# Altium PCB CARD-PIN.PCBDOC (part 2 of 2)
Units mil, origin at the board's own origin, x right, y up, seen from the top; angles counter-clockwise.
Board outline 5110 x 4320 mil, 2 copper layers (Top Layer, Bottom Layer); 210 components, 32 nets, 825 pads, 362 vias.
Unrouted connection lines stored in the file: 455.
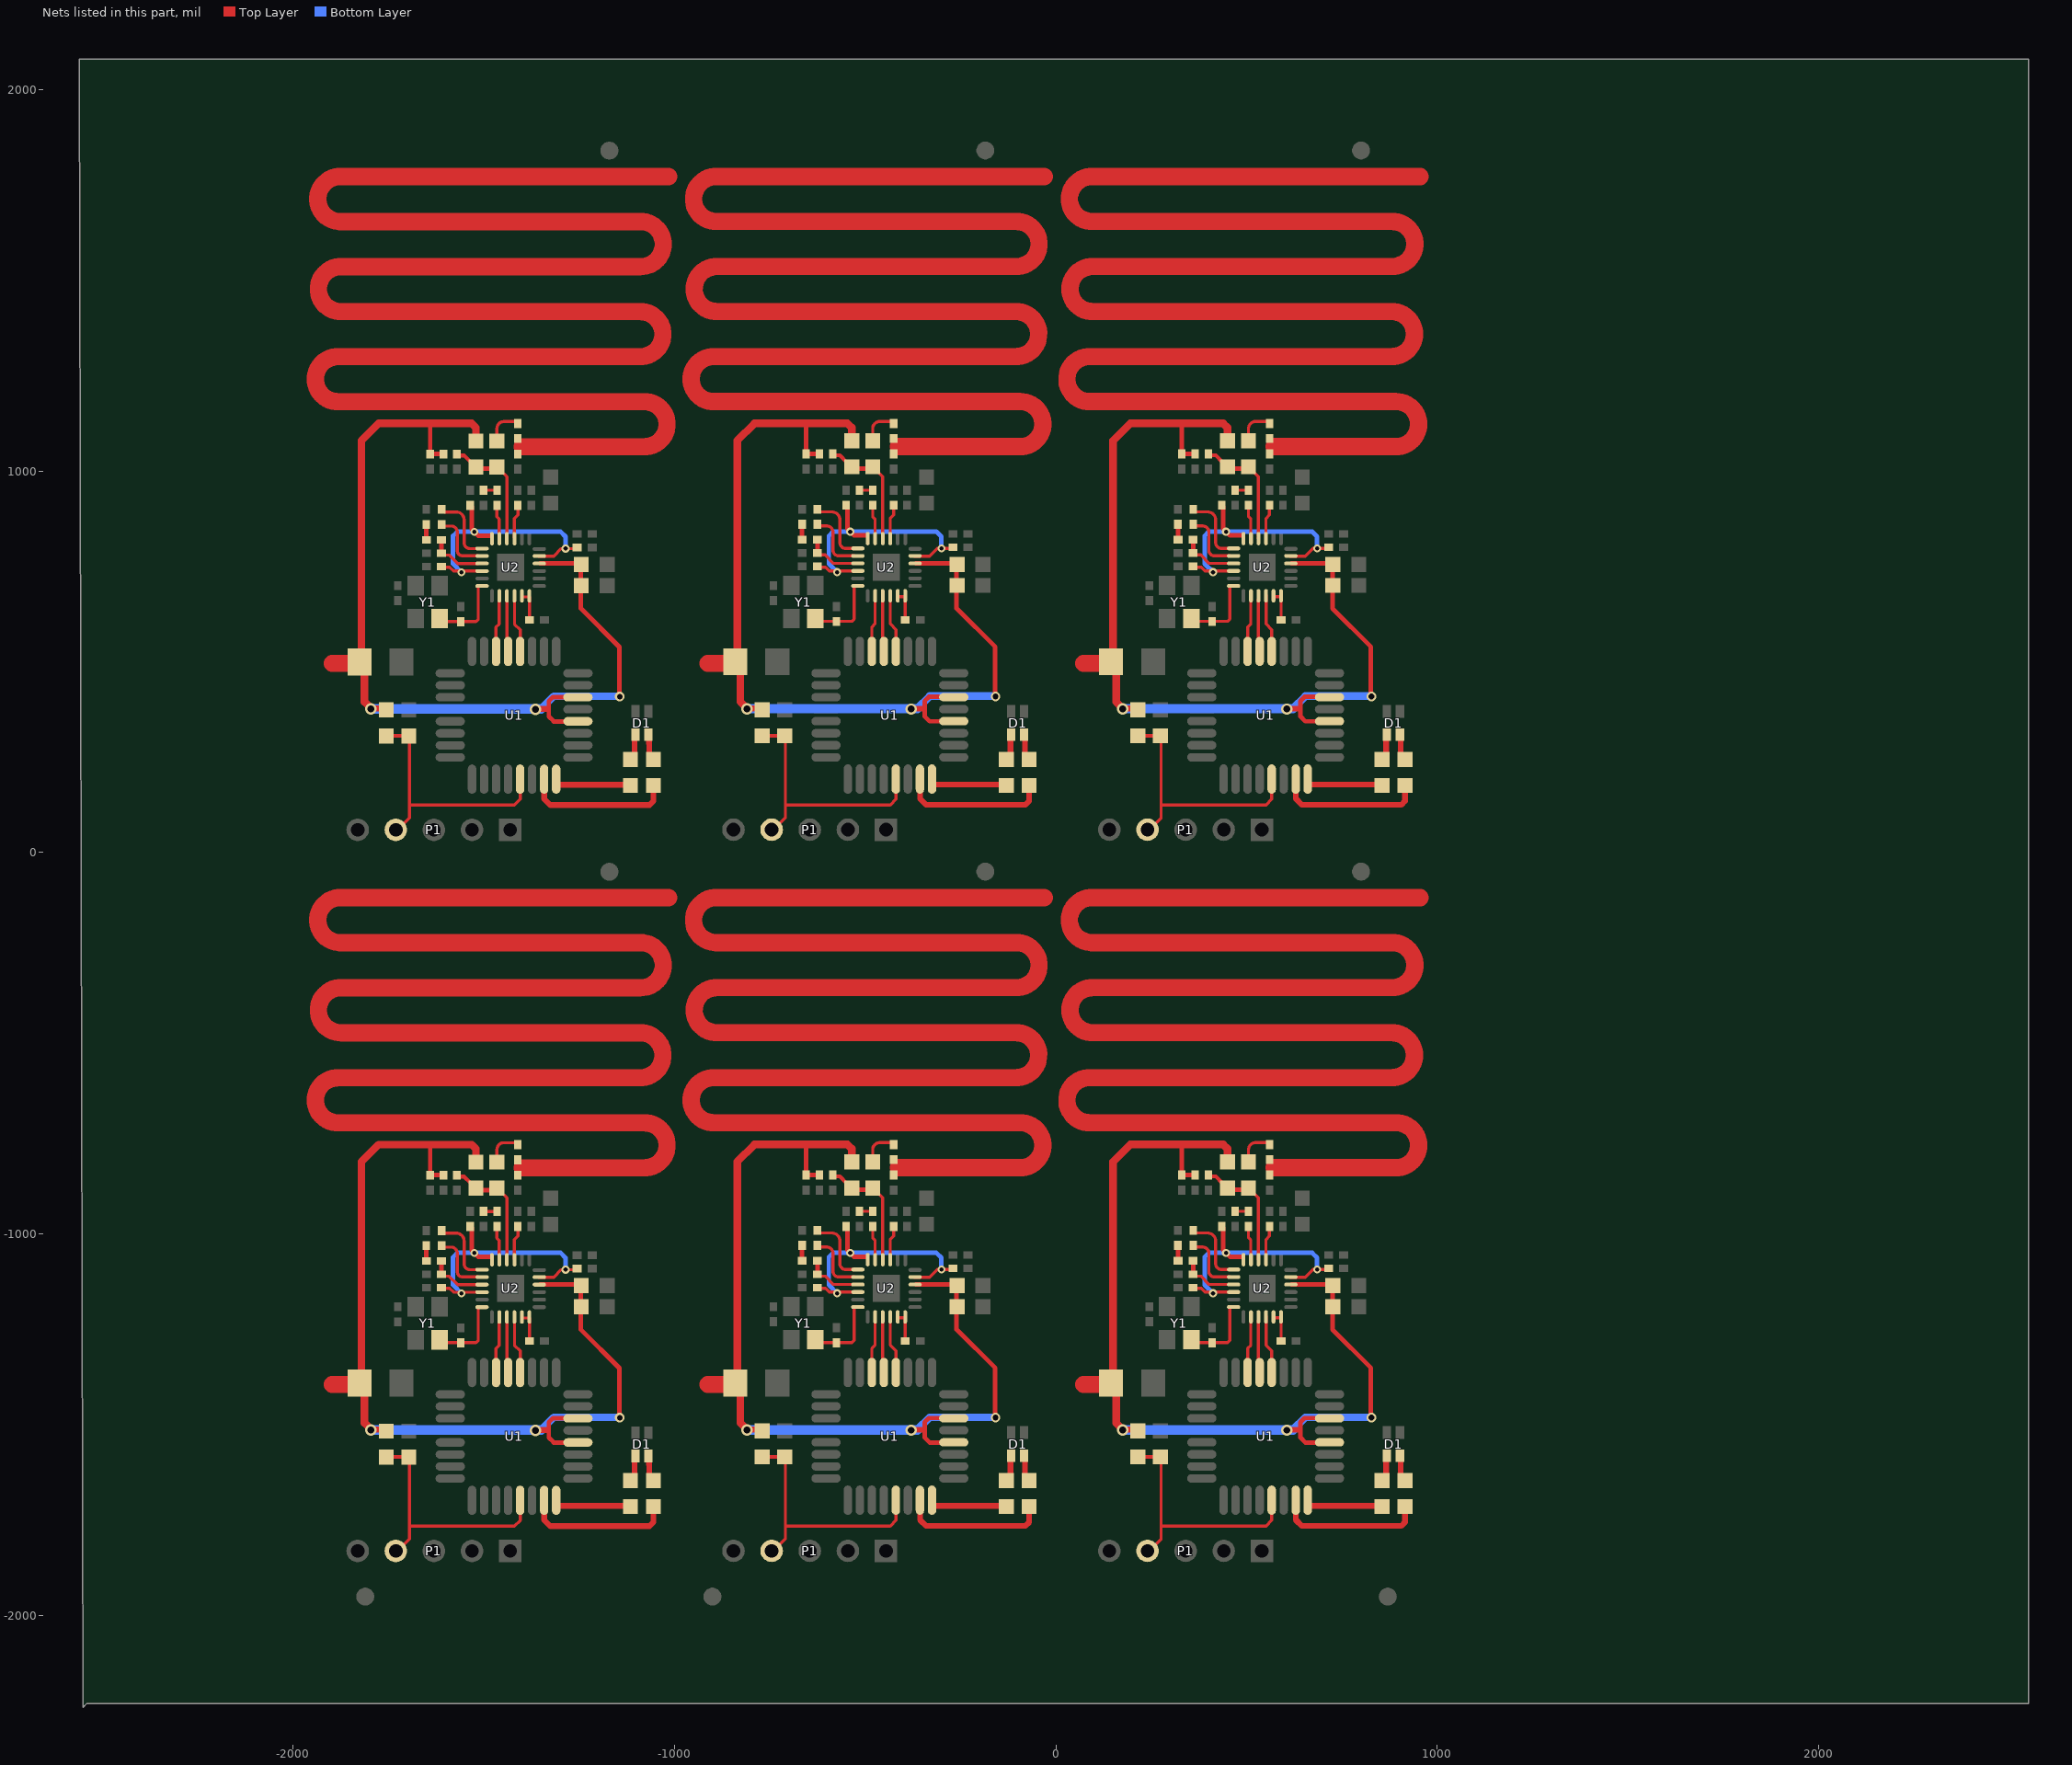
[diagram p2: the nets of this part, all layers, seen from the top]

## Via types
v1: diameter 28, hole 15, Top Layer to Bottom Layer, 240 vias
v2: diameter 20, hole 12, Top Layer to Bottom Layer, 36 vias
v3: diameter 20, hole 10, Top Layer to Bottom Layer, tented top, 30 vias
v4: diameter 21, hole 11, Top Layer to Bottom Layer, 18 vias
v5: diameter 22, hole 13, Top Layer to Bottom Layer, 18 vias
v6: diameter 30, hole 18, Top Layer to Bottom Layer, 12 vias
v7: diameter 25, hole 15, Top Layer to Bottom Layer, 6 vias
v8: diameter 24, hole 15, Top Layer to Bottom Layer, 2 vias

## Nets (pads, with @x,y where several pads share a name; then routed paths per layer and width w, separated by ;. In a path a pad name is that pad's centre, name@x,y a point inside that pad or via, vN(x,y) a via of type N, cw(c..) or ccw(c..) an arc to the next point about the centre after c; other vN are vias at no path point) (continued)
NetC9_2: C9.2 C12.2 | length 37793.3
  Top Layer w8: C12.2@-1411,-808.24 -1410,-808.03 C12.2@-1409.38,-807.9 ; C12.2@-1411,1081.76 -1410,1081.97 C12.2@-1409.38,1082.1 ; C12.2@-426,-808 -425,-807.79 C12.2@-424.38,-807.66 ; C12.2@-426,1082 -425,1082.21 C12.2@-424.38,1082.34 ; C12.2@559,-808 560,-807.79 C12.2@560.62,-807.66 ; C12.2@559,1082 560,1082.21 C12.2@560.62,1082.34
  Top Layer w13: C9.2@-1409.38,-845.22 C12.2@-1409.38,-807.9 ; C9.2@-1409.38,1044.78 C12.2@-1409.38,1082.1 ; C12.2@-1407.73,-805.22 C12.2@-1407.33,-802.25 ; C12.2@-1407.73,1084.78 C12.2@-1407.33,1087.75 ; C9.2@-424.38,-844.98 C12.2@-424.38,-807.66 ; C9.2@-424.38,1045.02 C12.2@-424.38,1082.34 ; C12.2@-422.73,-804.99 C12.2@-422.33,-802.02 ; C12.2@-422.73,1085.01 C12.2@-422.33,1087.98 ; C9.2@560.62,-844.98 C12.2@560.62,-807.66 ; C9.2@560.62,1045.02 C12.2@560.62,1082.34 ; C12.2@562.27,-804.99 C12.2@562.67,-802.02 ; C12.2@562.27,1085.01 C12.2@562.67,1087.98
  Top Layer w45.28: -1879.49,-708.25 -1080.51,-708.25 cw(c-1078.03,-767.26) -1081,-826.24 -1398,-826.24 ; -1879.49,-708.22 cw(c-1881.97,-649.22) -1879,-590.24 -1090.41,-590.24 ; -1879.49,1181.75 -1080.51,1181.75 cw(c-1078.03,1122.74) -1081,1063.76 -1398,1063.76 ; -1879.49,1181.78 cw(c-1881.97,1240.78) -1879,1299.76 -1090.41,1299.76 ; -1876,-236.29 -1090.52,-236.29 cw(c-1088.04,-295.29) -1091.01,-354.27 -1871,-354.27 ccw(c-1873.97,-413.25) -1871.49,-472.25 -1091.51,-472.25 cw(c-1089.03,-531.26) -1092,-590.24 ; -1876,-118.3 -1015,-118.3 ; -1876,1653.71 -1090.52,1653.71 cw(c-1088.04,1594.71) -1091.01,1535.73 -1871,1535.73 ccw(c-1873.97,1476.75) -1871.49,1417.75 -1091.51,1417.75 cw(c-1089.03,1358.74) -1092,1299.76 ; -1876,1771.7 -1015,1771.7 ; -1873,-236.24 cw(c-1875.48,-177.23) -1872.51,-118.25 ; -1873,1653.76 cw(c-1875.48,1712.77) -1872.51,1771.75 ; -891,-236.05 -105.52,-236.05 cw(c-103.04,-295.05) -106.01,-354.03 -886,-354.03 ccw(c-888.97,-413.01) -886.49,-472.02 -106.51,-472.02 cw(c-104.03,-531.02) -107,-590 ; -891,-118.07 -30,-118.07 ; -891,1653.95 -105.52,1653.95 cw(c-103.04,1594.95) -106.01,1535.97 -886,1535.97 ccw(c-888.97,1476.99) -886.49,1417.98 -106.51,1417.98 cw(c-104.03,1358.98) -107,1300 ; -891,1771.93 -30,1771.93 ; -888,-236 cw(c-890.48,-177) -887.51,-118.02 ; -888,1654 cw(c-890.48,1713) -887.51,1771.98 ; -413,-826 -96,-826 ccw(c-93.03,-767.02) -95.51,-708.02 -894.49,-708.02 cw(c-896.97,-648.98) -894,-590 -105.41,-590 ; -413,1064 -96,1064 ccw(c-93.03,1122.98) -95.51,1181.98 -894.49,1181.98 cw(c-896.97,1241.02) -894,1300 -105.41,1300 ; 94,-236.05 879.48,-236.05 cw(c881.96,-295.05) 878.99,-354.03 99,-354.03 ccw(c96.03,-413.01) 98.51,-472.02 878.49,-472.02 cw(c880.97,-531.02) 878,-590 ; 94,-118.07 955,-118.07 ; 94,1653.95 879.48,1653.95 cw(c881.96,1594.95) 878.99,1535.97 99,1535.97 ccw(c96.03,1476.99) 98.51,1417.98 878.49,1417.98 cw(c880.97,1358.98) 878,1300 ; 94,1771.93 955,1771.93 ; 97,-236 cw(c94.52,-177) 97.49,-118.02 ; 97,1654 cw(c94.52,1713) 97.49,1771.98 ; 572,-826 889,-826 ccw(c891.97,-767.02) 889.49,-708.02 90.51,-708.02 cw(c88.03,-648.98) 91,-590 879.59,-590 ; 572,1064 889,1064 ccw(c891.97,1122.98) 889.49,1181.98 90.51,1181.98 cw(c88.03,1241.02) 91,1300 879.59,1300
NetC10_1: C10.1 U2.3 | length 531.3
  Top Layer w8: U2.3@-1419.16,-1064.68 -1419.16,-1014.39 -1410,-1005.24 C10.1@-1410,-979.92 ; U2.3@-1419.16,825.32 -1419.16,875.61 -1410,884.76 C10.1@-1410,910.08 ; U2.3@-434.16,-1064.44 -434.16,-1014.16 -425,-1005 C10.1@-425,-979.68 ; U2.3@-434.16,825.56 -434.16,875.84 -425,885 C10.1@-425,910.32 ; U2.3@550.84,-1064.44 550.84,-1014.16 560,-1005 C10.1@560,-979.68 ; U2.3@550.84,825.56 550.84,875.84 560,885 C10.1@560,910.32
NetC11_2: C11.2 L2.1 L3.1 U2.4 | length 1708.5
  Top Layer w8: L2.1@-1455,-889.24 -1439,-905.24 U2.4@-1439,-1061.24 ; L2.1@-1455,1000.76 -1439,984.76 U2.4@-1439,828.76 ; U2.4@-1439,-1067.24 -1438.99,-1064.68 U2.4@-1439,-1066.24 ; U2.4@-1439,822.76 -1438.99,825.32 U2.4@-1439,823.76 ; L2.1@-470,-889 -454,-905 U2.4@-454,-1061 ; L2.1@-470,1001 -454,985 U2.4@-454,829 ; U2.4@-454,-1067 -453.99,-1064.44 U2.4@-454,-1066 ; U2.4@-454,823 -453.99,825.56 U2.4@-454,824 ; L2.1@515,-889 531,-905 U2.4@531,-1061 ; L2.1@515,1001 531,985 U2.4@531,829 ; U2.4@531,-1067 531.01,-1064.44 U2.4@531,-1066 ; U2.4@531,823 531.01,825.56 U2.4@531,824
  Top Layer w10: C11.2@-1567,-849.24 -1551,-849.24 L3.1@-1533.31,-866.92 ; C11.2@-1567,1040.76 -1551,1040.76 L3.1@-1533.31,1023.08 ; C11.2@-582,-849 -566,-849 L3.1@-548.31,-866.69 ; C11.2@-582,1041 -566,1041 L3.1@-548.31,1023.31 ; C11.2@403,-849 419,-849 L3.1@436.69,-866.69 ; C11.2@403,1041 419,1041 L3.1@436.69,1023.31
  Top Layer w12: L3.1@-1529,-884.24 L2.1@-1468,-884.24 ; L3.1@-1529,1005.76 L2.1@-1468,1005.76 ; L3.1@-544,-884 L2.1@-483,-884 ; L3.1@-544,1006 L2.1@-483,1006 ; L3.1@441,-884 L2.1@502,-884 ; L3.1@441,1006 L2.1@502,1006
NetC12_1: C12.1 L2.2 | length 560.2
  Top Layer w8: L2.2@-1465,-814.24 -1465,-778.31 cw(c-1447.93,-778.31) -1460,-766.24 ; L2.2@-1465,1075.76 -1465,1111.69 cw(c-1447.93,1111.69) -1460,1123.76 ; -1459,-765.24 cw(c-1447.51,-776.72) -1447.51,-760.48 C12.1@-1416.24,-760.48 ; -1459,1124.76 cw(c-1447.51,1113.28) -1447.51,1129.52 C12.1@-1416.24,1129.52 ; L2.2@-480,-814 -480,-778.07 cw(c-462.93,-778.07) -475,-766 ; L2.2@-480,1076 -480,1111.93 cw(c-462.93,1111.93) -475,1124 ; -474,-765 cw(c-462.51,-776.49) -462.51,-760.24 C12.1@-431.24,-760.24 ; -474,1125 cw(c-462.51,1113.51) -462.51,1129.76 C12.1@-431.24,1129.76 ; L2.2@505,-814 505,-778.07 cw(c522.07,-778.07) 510,-766 ; L2.2@505,1076 505,1111.93 cw(c522.07,1111.93) 510,1124 ; 511,-765 cw(c522.49,-776.49) 522.49,-760.24 C12.1@553.76,-760.24 ; 511,1125 cw(c522.49,1113.51) 522.49,1129.76 C12.1@553.76,1129.76
NetC13_1: C13.1 U2.17 U2.18 | length 438.1
  Top Layer w8: U2.17@-1399.47,-1219.8 -1379.79,-1219.8 C13.1@-1379.79,-1273.13 ; U2.17@-1399.47,670.2 -1379.79,670.2 C13.1@-1379.79,616.87 ; U2.17@-414.47,-1219.56 -394.79,-1219.56 C13.1@-394.79,-1272.9 ; U2.17@-414.47,670.44 -394.79,670.44 C13.1@-394.79,617.1 ; U2.17@570.53,-1219.56 590.21,-1219.56 C13.1@590.21,-1272.9 ; U2.17@570.53,670.44 590.21,670.44 C13.1@590.21,617.1
NetC16_2: C16.2 R2.2 | length 172.2
  Top Layer w8: C16.2@-1494.69,-940.55 R2.2@-1466,-940.55 ; C16.2@-1494.69,949.45 R2.2@-1466,949.45 ; C16.2@-509.69,-940.31 R2.2@-481,-940.31 ; C16.2@-509.69,949.69 R2.2@-481,949.69 ; C16.2@475.31,-940.31 R2.2@504,-940.31 ; C16.2@475.31,949.69 R2.2@504,949.69
NetC19_2: C19.2 R4.2 U2.9 | length 777
  Top Layer w8: C19.2@-1610,-1105.24 -1605,-1110.24 -1590,-1110.24 -1568,-1132.24 U2.9@-1514,-1132.24 ; C19.2@-1610,784.76 -1605,779.76 -1590,779.76 -1568,757.76 U2.9@-1514,757.76 ; C19.2@-625,-1105 -620,-1110 -605,-1110 -583,-1132 U2.9@-529,-1132 ; C19.2@-625,785 -620,780 -605,780 -583,758 U2.9@-529,758 ; C19.2@360,-1105 365,-1110 380,-1110 402,-1132 U2.9@456,-1132 ; C19.2@360,785 365,780 380,780 402,758 U2.9@456,758
  Top Layer w12: C19.2@-1610,-1097.55 R4.2@-1610,-1075.24 ; C19.2@-1610,792.45 R4.2@-1610,814.76 ; C19.2@-625,-1097.31 R4.2@-625,-1075 ; C19.2@-625,792.69 R4.2@-625,815 ; C19.2@360,-1097.31 R4.2@360,-1075 ; C19.2@360,792.69 R4.2@360,815
NetC20_2: C20.2 R4.1 | length 258
  Top Layer w12: R4.1@-1650,-1073.24 C20.2@-1650,-1030.24 ; R4.1@-1650,816.76 C20.2@-1650,859.76 ; R4.1@-665,-1073 C20.2@-665,-1030 ; R4.1@-665,817 C20.2@-665,860 ; R4.1@320,-1073 C20.2@320,-1030 ; R4.1@320,817 C20.2@320,860
NetC21_2: C21.2 U2.12 Y1.3 | length 1081.6
  Top Layer w8: Y1.3@-1605,-1284.24 -1520,-1284.24 -1514,-1278.24 U2.12@-1514,-1191.45 ; Y1.3@-1605,605.76 -1520,605.76 -1514,611.76 U2.12@-1514,698.55 ; Y1.3@-620,-1284 -535,-1284 -529,-1278 U2.12@-529,-1191.21 ; Y1.3@-620,606 -535,606 -529,612 U2.12@-529,698.79 ; Y1.3@365,-1284 450,-1284 456,-1278 U2.12@456,-1191.21 ; Y1.3@365,606 450,606 456,612 U2.12@456,698.79
NetD1_1: D1.1 R3.2 | length 312.1
  Top Layer w15: R3.2@-1103.99,-1637.22 D1.1@-1104,-1587.24 ; R3.2@-1103.99,252.78 D1.1@-1104,302.76 ; D1.1@-1103,-1579.24 D1.1@-1102.92,-1581.27 ; D1.1@-1103,310.76 D1.1@-1102.92,308.73 ; R3.2@-118.98,-1636.99 D1.1@-119,-1587 ; R3.2@-118.98,253.01 D1.1@-119,303 ; D1.1@-118,-1579 D1.1@-117.92,-1581.04 ; D1.1@-118,311 D1.1@-117.92,308.96 ; R3.2@866.02,-1636.99 D1.1@866,-1587 ; R3.2@866.02,253.01 D1.1@866,303 ; D1.1@867,-1579 D1.1@867.08,-1581.04 ; D1.1@867,311 D1.1@867.08,308.96
NetD1_2: D1.2 R5.2 | length 299.9
  Top Layer w15: R5.2@-1065.98,-1632.22 D1.2@-1066,-1582.24 ; R5.2@-1065.98,257.78 D1.2@-1066,307.76 ; R5.2@-80.98,-1631.99 D1.2@-81,-1582 ; R5.2@-80.98,258.01 D1.2@-81,308 ; R5.2@904.02,-1631.99 D1.2@904,-1582 ; R5.2@904.02,258.01 D1.2@904,308
NetL4_1: L4.1 U2.7 | length 1059.3
  Top Layer w8: L4.1@-1602,-997.24 -1571,-997.24 ; L4.1@-1602,892.76 -1571,892.76 ; -1572,-997.24 cw(c-1572,-1018.24) -1551,-1018.24 ; -1572,892.76 cw(c-1572,871.76) -1551,871.76 ; -1551,-1017.24 -1551,-1078.24 ccw(c-1536,-1078.24) -1536,-1093.24 U2.7@-1508,-1093.24 ; -1551,872.76 -1551,811.76 ccw(c-1536,811.76) -1536,796.76 U2.7@-1508,796.76 ; L4.1@-617,-997 -586,-997 ; L4.1@-617,893 -586,893 ; -587,-997 cw(c-587,-1018) -566,-1018 ; -587,893 cw(c-587,872) -566,872 ; -566,-1017 -566,-1078 ccw(c-551,-1078) -551,-1093 U2.7@-523,-1093 ; -566,873 -566,812 ccw(c-551,812) -551,797 U2.7@-523,797 ; L4.1@368,-997 399,-997 ; L4.1@368,893 399,893 ; 398,-997 cw(c398,-1018) 419,-1018 ; 398,893 cw(c398,872) 419,872 ; 419,-1017 419,-1078 ccw(c434,-1078) 434,-1093 U2.7@462,-1093 ; 419,873 419,812 ccw(c434,812) 434,797 U2.7@462,797
NetL4_2: L4.2 U2.8 | length 966.7
  Top Layer w8: L4.2@-1609,-1034.24 -1585,-1034.24 cw(c-1585,-1050.24) -1569,-1050.24 -1569,-1098.24 ccw(c-1555,-1098.24) -1555,-1112.24 ; L4.2@-1609,855.76 -1585,855.76 cw(c-1585,839.76) -1569,839.76 -1569,791.76 ccw(c-1555,791.76) -1555,777.76 ; -1556,-1112.24 U2.8@-1514,-1112.24 ; -1556,777.76 U2.8@-1514,777.76 ; L4.2@-624,-1034 -600,-1034 cw(c-600,-1050) -584,-1050 -584,-1098 ccw(c-570,-1098) -570,-1112 ; L4.2@-624,856 -600,856 cw(c-600,840) -584,840 -584,792 ccw(c-570,792) -570,778 ; -571,-1112 U2.8@-529,-1112 ; -571,778 U2.8@-529,778 ; L4.2@361,-1034 385,-1034 cw(c385,-1050) 401,-1050 401,-1098 ccw(c415,-1098) 415,-1112 ; L4.2@361,856 385,856 cw(c385,840) 401,840 401,792 ccw(c415,792) 415,778 ; 414,-1112 U2.8@456,-1112 ; 414,778 U2.8@456,778
NetR2_1: R2.1 U2.5 | length 470.9
  Top Layer w8: R2.1@-1465,-983.24 -1465,-1010.24 -1459,-1016.24 U2.5@-1459,-1059.24 ; R2.1@-1465,906.76 -1465,879.76 -1459,873.76 U2.5@-1459,830.76 ; R2.1@-480,-983 -480,-1010 -474,-1016 U2.5@-474,-1059 ; R2.1@-480,907 -480,880 -474,874 U2.5@-474,831 ; R2.1@505,-983 505,-1010 511,-1016 U2.5@511,-1059 ; R2.1@505,907 505,880 511,874 U2.5@511,831
NetR3_1: R3.1 U1.32 | length 1171.9
  Top Layer w15: U1.32@-1309.99,-1697.56 U1.32@-1310,-1695.24 ; U1.32@-1309.99,192.44 U1.32@-1310,194.76 ; U1.32@-1306,-1712.24 R3.1@-1113,-1712.24 ; U1.32@-1306,177.76 R3.1@-1113,177.76 ; U1.32@-324.99,-1697.32 U1.32@-325,-1695 ; U1.32@-324.99,192.68 U1.32@-325,195 ; U1.32@-321,-1712 R3.1@-128,-1712 ; U1.32@-321,178 R3.1@-128,178 ; U1.32@660.01,-1697.32 U1.32@660,-1695 ; U1.32@660.01,192.68 U1.32@660,195 ; U1.32@664,-1712 R3.1@857,-1712 ; U1.32@664,178 R3.1@857,178
NetR5_1: R5.1 U1.31 | length 2379.4
  Top Layer w15: U1.31@-1341,-1693.24 -1341.02,-1697.56 -1341.01,-1749.23 -1325,-1765.24 -1064.92,-1765.16 -1055,-1755.23 -1055.01,-1714.25 R5.1@-1053,-1712.24 ; U1.31@-1341,196.76 -1341.02,192.44 -1341.01,140.77 -1325,124.76 -1064.92,124.84 -1055,134.77 -1055.01,175.75 R5.1@-1053,177.76 ; U1.31@-356,-1693 -356.02,-1697.32 -356.01,-1749 -340,-1765 -79.92,-1764.92 -70,-1755 R5.1@-70,-1714 R5.1@-68,-1712 ; U1.31@-356,197 -356.02,192.68 -356.01,141 -340,125 -79.92,125.08 -70,135 R5.1@-70,176 R5.1@-68,178 ; U1.31@629,-1693 628.98,-1697.32 628.99,-1749 645,-1765 905.08,-1764.92 915,-1755 R5.1@915,-1714 R5.1@917,-1712 ; U1.31@629,197 628.98,192.68 628.99,141 645,125 905.08,125.08 915,135 R5.1@915,176 R5.1@917,178
RST: C4.1 P1.4 R1.1 U1.29 | length 3882.7
  Top Layer w8: P1.4@-1730,-1835.24 -1694,-1799.24 C4.1@-1694,-1584.24 ; P1.4@-1730,54.76 -1694,90.76 C4.1@-1694,305.76 ; -1692,-1765.24 -1419,-1765.24 -1404,-1750.24 U1.29@-1404,-1722.24 ; -1692,124.76 -1419,124.76 -1404,139.76 U1.29@-1404,167.76 ; P1.4@-745,-1835 -709,-1799 C4.1@-709,-1584 ; P1.4@-745,55 -709,91 C4.1@-709,306 ; -707,-1765 -434,-1765 -419,-1750 U1.29@-419,-1722 ; -707,125 -434,125 -419,140 U1.29@-419,168 ; P1.4@240,-1835 276,-1799 C4.1@276,-1584 ; P1.4@240,55 276,91 C4.1@276,306 ; 278,-1765 551,-1765 566,-1750 U1.29@566,-1722 ; 278,125 551,125 566,140 U1.29@566,168
  Top Layer w10: R1.1@-1755,-1584.24 C4.1@-1696,-1584.24 ; R1.1@-1755,305.76 C4.1@-1696,305.76 ; R1.1@-770,-1584 C4.1@-711,-1584 ; R1.1@-770,306 C4.1@-711,306 ; R1.1@215,-1584 C4.1@274,-1584 ; R1.1@215,306 C4.1@274,306
SCK: U1.13 U2.15 | length 690
  Top Layer w8: U1.13@-1439,-1341.24 U2.15@-1439,-1226.24 ; U1.13@-1439,548.76 U2.15@-1439,663.76 ; U1.13@-454,-1341 U2.15@-454,-1226 ; U1.13@-454,549 U2.15@-454,664 ; U1.13@531,-1341 U2.15@531,-1226 ; U1.13@531,549 U2.15@531,664
SCS: U1.14 U2.14 | length 870.6
  Top Layer w8: U1.14@-1467.24,-1362.91 -1467.24,-1299.48 -1459,-1291.24 U2.14@-1459,-1221.24 ; U1.14@-1467.24,527.09 -1467.24,590.52 -1459,598.76 U2.14@-1459,668.76 ; U1.14@-482.24,-1362.68 -482.24,-1299.24 -474,-1291 U2.14@-474,-1221 ; U1.14@-482.24,527.32 -482.24,590.76 -474,599 U2.14@-474,669 ; U1.14@502.76,-1362.68 502.76,-1299.24 511,-1291 U2.14@511,-1221 ; U1.14@502.76,527.32 502.76,590.76 511,599 U2.14@511,669
SDIO: U1.12 U2.16 | length 850.6
  Top Layer w8: U2.16@-1419,-1219.8 U2.16@-1419,-1219.24 ; U2.16@-1419,-1216.24 -1419,-1291.24 -1404,-1306.24 U1.12@-1404,-1351.24 ; U2.16@-1419,670.2 U2.16@-1419,670.76 ; U2.16@-1419,673.76 -1419,598.76 -1404,583.76 U1.12@-1404,538.76 ; U2.16@-434,-1219.56 U2.16@-434,-1219 ; U2.16@-434,-1216 -434,-1291 -419,-1306 U1.12@-419,-1351 ; U2.16@-434,670.44 U2.16@-434,671 ; U2.16@-434,674 -434,599 -419,584 U1.12@-419,539 ; U2.16@551,-1219.56 U2.16@551,-1219 ; U2.16@551,-1216 551,-1291 566,-1306 U1.12@566,-1351 ; U2.16@551,670.44 U2.16@551,671 ; U2.16@551,674 551,599 566,584 U1.12@566,539
VCC: C1.2 C5.1 C6.1 C14.1 C15.1 L3.2 R1.2 U1.4 U1.6 U2.22 | length 15657.4
  Top Layer w12: C15.1@-1641,-846.24 -1640,-845.24 -1640,-765.24 ; C15.1@-1641,-845.24 C14.1@-1603,-845.24 ; C15.1@-1641,1043.76 -1640,1044.76 -1640,1124.76 ; C15.1@-1641,1044.76 C14.1@-1603,1044.76 ; U2.22@-1351.44,-1132.39 C6.1@-1244,-1132.39 ; U2.22@-1351.44,757.61 C6.1@-1244,757.61 ; U1.4@-1272,-1546.24 -1316,-1546.24 -1329,-1533.24 -1329,-1493.24 -1318,-1482.24 U1.6@-1271,-1482.24 ; U1.4@-1272,343.76 -1316,343.76 -1329,356.76 -1329,396.76 -1318,407.76 U1.6@-1271,407.76 ; C6.1@-1245,-1135.24 -1245,-1250.24 -1144,-1351.24 v7@-1144,-1480.24 ; C6.1@-1245,754.76 -1245,639.76 -1144,538.76 v7@-1144,409.76 ; C15.1@-656,-846 -655,-845 -655,-765 ; C15.1@-656,-845 C14.1@-618,-845 ; C15.1@-656,1044 -655,1045 -655,1125 ; C15.1@-656,1045 C14.1@-618,1045 ; U2.22@-366.44,-1132.16 C6.1@-259,-1132.16 ; U2.22@-366.44,757.84 C6.1@-259,757.84 ; U1.4@-287,-1546 -331,-1546 -344,-1533 -344,-1493 -333,-1482 U1.6@-286,-1482 ; U1.4@-287,344 -331,344 -344,357 -344,397 -333,408 U1.6@-286,408 ; C6.1@-260,-1135 -260,-1250 -159,-1351 v7@-159,-1480 ; C6.1@-260,755 -260,640 -159,539 v7@-159,410 ; C15.1@329,-846 330,-845 330,-765 ; C15.1@329,-845 C14.1@367,-845 ; C15.1@329,1044 330,1045 330,1125 ; C15.1@329,1045 C14.1@367,1045 ; U2.22@618.56,-1132.16 C6.1@726,-1132.16 ; U2.22@618.56,757.84 C6.1@726,757.84 ; U1.4@698,-1546 654,-1546 641,-1533 641,-1493 652,-1482 U1.6@699,-1482 ; U1.4@698,344 654,344 641,357 641,397 652,408 U1.6@699,408 ; C6.1@725,-1135 725,-1250 826,-1351 v7@826,-1480 ; C6.1@725,755 725,640 826,539 v7@826,410
  Top Layer w15: v6@-1363,-1513.24 -1332,-1513.24 ; v6@-1363,376.76 -1332,376.76 ; v6@-378,-1513 -347,-1513 ; v6@-378,377 -347,377 ; v6@607,-1513 638,-1513 ; v6@607,377 638,377
  Top Layer w16: v6@-1795,-1512.24 R1.2@-1759,-1512.24 ; v6@-1795,377.76 R1.2@-1759,377.76 ; v6@-810,-1512 R1.2@-774,-1512 ; v6@-810,378 R1.2@-774,378 ; v6@175,-1512 R1.2@211,-1512 ; v6@175,378 R1.2@211,378
  Top Layer w20: C1.2@-1820,-1380.24 -1820,-810.24 -1775,-765.24 -1531,-765.24 -1520,-776.24 L3.2@-1520,-811.24 ; C1.2@-1820,509.76 -1820,1079.76 -1775,1124.76 -1531,1124.76 -1520,1113.76 L3.2@-1520,1078.76 ; C1.2@-1812,-1396.24 -1812,-1495.24 v6@-1795,-1512.24 ; C1.2@-1812,493.76 -1812,394.76 v6@-1795,377.76 ; C1.2@-835,-1380 -835,-810 -790,-765 -546,-765 -535,-776 L3.2@-535,-811 ; C1.2@-835,510 -835,1080 -790,1125 -546,1125 -535,1114 L3.2@-535,1079 ; C1.2@-827,-1396 -827,-1495 v6@-810,-1512 ; C1.2@-827,494 -827,395 v6@-810,378 ; C1.2@150,-1380 150,-810 195,-765 439,-765 450,-776 L3.2@450,-811 ; C1.2@150,510 150,1080 195,1125 439,1125 450,1114 L3.2@450,1079 ; C1.2@158,-1396 158,-1495 v6@175,-1512 ; C1.2@158,494 158,395 v6@175,378
  Top Layer w45: -1897,-1394.24 C1.2@-1849,-1394.24 ; -1897,495.76 C1.2@-1849,495.76 ; -912,-1394 C1.2@-864,-1394 ; -912,496 C1.2@-864,496 ; 73,-1394 C1.2@121,-1394 ; 73,496 C1.2@121,496
  Bottom Layer w20: -1349,-1513.24 -1316,-1480.24 v7@-1143,-1480.24 ; -1349,376.76 -1316,409.76 v7@-1143,409.76 ; -364,-1513 -331,-1480 v7@-158,-1480 ; -364,377 -331,410 v7@-158,410 ; 621,-1513 654,-1480 v7@827,-1480 ; 621,377 654,410 v7@827,410
  Bottom Layer w25: v6@-1794,-1513.24 -1349,-1513.24 ; v6@-1794,376.76 -1349,376.76 ; v6@-809,-1513 -364,-1513 ; v6@-809,377 -364,377 ; v6@176,-1513 621,-1513 ; v6@176,377 621,377
  other v6: -1364,-1514.24 -379,-1514 606,-1514 -1795,-1513.24 -810,-1513 175,-1513 -1364,375.76 -379,376 606,376 -1795,376.76 -810,377 175,377
  other v7: -1143,-1481.24 -158,-1481 827,-1481 -1143,408.76 -158,409 827,409
VDA: C3.1 C17.1 C18.2 U2.6 U2.10 U2.23 | length 4613
  Top Layer w8: C18.2@-1604,-1142.24 -1589,-1142.24 -1579,-1152.24 U2.10@-1499,-1152.24 ; C18.2@-1604,747.76 -1589,747.76 -1579,737.76 U2.10@-1499,737.76 ; U2.23@-1356,-1113.24 -1316,-1113.24 -1296,-1093.24 C3.1@-1260,-1093.24 ; U2.23@-1356,776.76 -1316,776.76 -1296,796.76 C3.1@-1260,796.76 ; C18.2@-619,-1142 -604,-1142 -594,-1152 U2.10@-514,-1152 ; C18.2@-619,748 -604,748 -594,738 U2.10@-514,738 ; U2.23@-371,-1113 -331,-1113 -311,-1093 C3.1@-275,-1093 ; U2.23@-371,777 -331,777 -311,797 C3.1@-275,797 ; C18.2@366,-1142 381,-1142 391,-1152 U2.10@471,-1152 ; C18.2@366,748 381,748 391,738 U2.10@471,738 ; U2.23@614,-1113 654,-1113 674,-1093 C3.1@710,-1093 ; U2.23@614,777 654,777 674,797 C3.1@710,797
  Top Layer w12: C17.1@-1531,-983.92 -1531,-1042.24 -1514,-1059.24 U2.6@-1481,-1059.24 ; C17.1@-1531,906.08 -1531,847.76 -1514,830.76 U2.6@-1481,830.76 ; C17.1@-546,-983.68 -546,-1042 -529,-1059 U2.6@-496,-1059 ; C17.1@-546,906.32 -546,848 -529,831 U2.6@-496,831 ; C17.1@439,-983.68 439,-1042 456,-1059 U2.6@489,-1059 ; C17.1@439,906.32 439,848 456,831 U2.6@489,831
  Bottom Layer w12: v4(-1558,-1155.24) -1580,-1133.24 -1580,-1060.24 -1569,-1049.24 -1298,-1049.24 -1285,-1062.24 v4(-1285,-1093.24) ; v4(-1558,734.76) -1580,756.76 -1580,829.76 -1569,840.76 -1298,840.76 -1285,827.76 v4(-1285,796.76) ; v4(-573,-1155) -595,-1133 -595,-1060 -584,-1049 -313,-1049 -300,-1062 v4(-300,-1093) ; v4(-573,735) -595,757 -595,830 -584,841 -313,841 -300,828 v4(-300,797) ; v4(412,-1155) 390,-1133 390,-1060 401,-1049 672,-1049 685,-1062 v4(685,-1093) ; v4(412,735) 390,757 390,830 401,841 672,841 685,828 v4(685,797)
  other v4: -1524,-1049.24 -539,-1049 446,-1049 -1524,840.76 -539,841 446,841
pads on no net: U1.2 U1.7 U1.8 U1.10 U1.11 U1.18 U1.19 U1.20 U1.22 U1.23 U1.24 U1.25 U1.26 U1.27 U1.28 U1.30 U2.21 Y1.2 Y1.4
copper on no net: | length 57505.7
  Top Layer w6: -5910,-5670.94 -5910,-5790.71 -2955,-5790.71 -2955,-5670.71 ; -5910,-3780.94 -5910,-3900.71 -2955,-3900.71 -2955,-3780.71 ; -3940,-5670.71 -3940,-5790.47 -985,-5790.47 -985,-5670.47 ; -3940,-3780.71 -3940,-3900.47 -985,-3900.47 -985,-3780.47 ; -2955,-5670.47 -2955,-5790.24 0,-5790.24 0,-5670.24 ; -2955,-5670.24 -2955,-5790 0,-5790 0,-5670 ; -2955,-3780.47 -2955,-3900.24 0,-3900.24 0,-3780.24 ; -2955,-3780.24 -2955,-3900 0,-3900 0,-3780 ; -1970,-5670.24 -1970,-5790 985,-5790 985,-5670 ; -1970,-3780.24 -1970,-3900 985,-3900 985,-3780 ; -4925,-5790.47 -1970,-5790.47 ; -4925,-5790.47 -4925,-5670.71 -4925,-5790.47 ; -4925,-5790.47 -1970,-5790.47 ; -4925,-3900.47 -4925,-3780.71 -4925,-3900.47 ; -4925,-3900.47 -1970,-3900.47 ; -4925,-3900.47 -1970,-3900.47 ; -3940,-5790.24 -985,-5790.24 ; -3940,-5790.24 -3940,-5670.47 -3940,-5790.24 ; -3940,-5790.24 -985,-5790.24 ; -3940,-3900.24 -985,-3900.24 ; -3940,-3900.24 -3940,-3780.47 -3940,-3900.24 ; -3940,-3900.24 -985,-3900.24 ; -1970,-5790.47 -1970,-5670.47 -1970,-5790.47 ; -1970,-3900.47 -1970,-3780.47 -1970,-3900.47 ; -985,-5790.24 -985,-5670.24 -985,-5790.24 ; -985,-3900.24 -985,-3780.24 -985,-3900.24
  other v8: 985,0 985,0

## Polygon pours and split planes (outlines as drawn)
GND on Top Layer "Bottom Layer-No Net" (solid, remove dead copper, pour order 1000): -85,95 -75,85 1135,85 1135,-2045 1150,-2060 1145,-2065 -125,-2065
GND on Top Layer "Bottom Layer-No Net" (solid, remove dead copper, pour order 1000): -1070,95 -1060,85 150,85 150,-2045 165,-2060 160,-2065 -1110,-2065
GND on Top Layer "Bottom Layer-No Net" (solid, remove dead copper, pour order 1000): -2055,94.76 -2045,84.76 -835,84.76 -835,-2045.24 -820,-2060.24 -825,-2065.24 -2095,-2065.24
GND on Top Layer "Bottom Layer-No Net" (solid, remove dead copper, pour order 1000): -2055,1984.76 -2045,1974.76 -835,1974.76 -835,-155.24 -820,-170.24 -825,-175.24 -2095,-175.24
GND on Top Layer "Bottom Layer-No Net" (solid, remove dead copper, pour order 1000): -1070,1985 -1060,1975 150,1975 150,-155 165,-170 160,-175 -1110,-175
GND on Top Layer "Bottom Layer-No Net" (solid, remove dead copper, pour order 1000): -85,1985 -75,1975 1135,1975 1135,-155 1150,-170 1145,-175 -125,-175
GND on Bottom Layer "Bottom Layer-No Net" (solid, remove dead copper, pour order 1001): -490,210 1255,210 1345,120 1200,-25 1200,-1915 -150,-1915 -210,-1975
GND on Bottom Layer "Bottom Layer-No Net" (solid, remove dead copper, pour order 1001): -1475,210 270,210 360,120 215,-25 215,-1915 -1135,-1915 -1195,-1975
GND on Bottom Layer "Bottom Layer-No Net" (solid, remove dead copper, pour order 1001): -2460,209.76 -715,209.76 -625,119.76 -770,-25.24 -770,-1915.24 -2120,-1915.24 -2180,-1975.24
GND on Bottom Layer "Bottom Layer-No Net" (solid, remove dead copper, pour order 1001): -2460,2099.76 -715,2099.76 -625,2009.76 -770,1864.76 -770,-25.24 -2120,-25.24 -2180,-85.24
GND on Bottom Layer "Bottom Layer-No Net" (solid, remove dead copper, pour order 1001): -1475,2100 270,2100 360,2010 215,1865 215,-25 -1135,-25 -1195,-85
GND on Bottom Layer "Bottom Layer-No Net" (solid, remove dead copper, pour order 1001): -490,2100 1255,2100 1345,2010 1200,1865 1200,-25 -150,-25 -210,-85

## Keep-outs
Keep-Out Layer:
  lines w6: -1970,-1890.24 -1075,-1890.24 -1075,-1810.24 -1030,-1810.24 -1030,-1890.24 -985,-1890.24 ; -1970,-0.24 -1075,-0.24 -1075,79.76 -1030,79.76 -1030,-0.24 ; -1075,-80.24 -1030,-80.24 -1030,-0.24 ; -1075,-79.76 -1075,-0.47 -1970,-0.47 ; -1075,1809.76 -1030,1809.76 -1030,1889.76 -985,1889.76 ; -1075,1810.24 -1075,1889.53 -1970,1889.53 -1970,-0.47 ; -985,-1890 -90,-1890 -90,-1810 -45,-1810 -45,-1890 0,-1890 ; -985,0 -90,0 -90,80 -45,80 -45,0 ; -90,-80 -45,-80 -45,0 ; -90,-79.53 -90,-0.24 -985,-0.24 ; -90,1810 -45,1810 -45,1890 0,1890 ; -90,1810.47 -90,1889.76 -985,1889.76 ; 0,-1890.24 0,-0.24 ; 895,-80 940,-80 940,0 ; 895,-79.53 895,-0.24 0,-0.24 ; 895,1810 940,1810 940,1890 985,1890 985,0 ; 895,1810.47 895,1889.76 0,1889.76 0,-0.24 ; -1970,-0.47 -1970,-1890.47 -1970,-2000 985,-2000 985,-1890 ; -1030,-0.24 -985,-0.24 ; -1030,-0.24 -985,-0.24 ; -985,-1890.24 -985,-0.24 ; -985,-1890.24 -985,-0.24 ; -985,-0.24 -985,1889.76 ; -985,-0.24 -985,1889.76 ; -45,0 0,0 ; -45,0 0,0 ; 0,-1890 895,-1890 895,-1810 940,-1810 940,-1890 985,-1890 ; 0,-1890 0,0 ; 0,0 895,0 895,80 940,80 940,0 ; 940,0 985,0 ; 940,0 985,0 ; 985,-1890 985,0

## Other copper
Top Layer:
  rectangle net VCC: 13,-1470 105,-1308
  rectangle net GND: 13,-992 105,-820
  rectangle net GND: 15,-1070 120,-800
  rectangle net GND: -970,-1070 -865,-800
  rectangle net GND: -972,-992 -880,-820
  rectangle net VCC: -972,-1470 -880,-1308
  rectangle net GND: -1955,-1070.24 -1850,-800.24
  rectangle net GND: -1957,-992.24 -1865,-820.24
  rectangle net VCC: -1957,-1470.24 -1865,-1308.24
  rectangle net VCC: -1957,419.76 -1865,581.76
  rectangle net GND: -1957,897.76 -1865,1069.76
  rectangle net GND: -1955,819.76 -1850,1089.76
  rectangle net VCC: -972,420 -880,582
  rectangle net GND: -972,898 -880,1070
  rectangle net GND: -970,820 -865,1090
  rectangle net GND: 15,820 120,1090
  rectangle net GND: 13,898 105,1070
  rectangle net VCC: 13,420 105,582
  pour cut-out: 485,-1090 595,-1090 595,-1200 485,-1200
  pour cut-out: -500,-1090 -390,-1090 -390,-1200 -500,-1200
  pour cut-out: -1485,-1090.24 -1375,-1090.24 -1375,-1200.24 -1485,-1200.24
  pour cut-out: -1485,799.76 -1375,799.76 -1375,689.76 -1485,689.76
  pour cut-out: -500,800 -390,800 -390,690 -500,690
  pour cut-out: 485,800 595,800 595,690 485,690
Bottom Layer:
  rectangle net GND: 475,-1205 600,-1090
  rectangle net GND: -510,-1205 -385,-1090
  rectangle net GND: -1495,-1205.24 -1370,-1090.24
  rectangle net GND: -1495,684.76 -1370,799.76
  rectangle net GND: -510,685 -385,800
  rectangle net GND: 475,685 600,800

## Silkscreen, mask and mechanical layers (free items; w line width, h text height)
Top Overlay:
  lines w6: -1355,-1015.24 -1355,-920.24 -1360,-920.24 -1560,-920.24 -1560,-1010.24 -1560,-1015.24 -1070,-1015.24 ; -1355,874.76 -1355,969.76 -1360,969.76 -1560,969.76 -1560,879.76 -1560,874.76 -1070,874.76 ; -370,-1015 -370,-920 -375,-920 -575,-920 -575,-1010 -575,-1015 -85,-1015 ; -370,875 -370,970 -375,970 -575,970 -575,880 -575,875 -85,875 ; 615,-1015 615,-920 610,-920 410,-920 410,-1010 410,-1015 900,-1015 ; 615,875 615,970 610,970 410,970 410,880 410,875 900,875 ; -1250,-1015.24 -1250,-915.24 -1030,-915.24 -1030,-1015.24 -1250,-1015.24 ; -1250,874.76 -1030,874.76 -1030,974.76 -1250,974.76 -1250,874.76 ; -265,-1015 -265,-915 -45,-915 -45,-1015 -265,-1015 ; -265,875 -45,875 -45,975 -265,975 -265,875 ; 720,-1015 940,-1015 940,-915 720,-915 720,-1015 ; 720,875 720,975 940,975 940,875 720,875
  text "RFID CARD V1.2" at -1760,1454.76 h60
  text "RFID CARD V1.2" at -775,1455 h60
  text "RFID CARD V1.2" at 210,1455 h60
  text "+" at -1930,349.76 h100
  text "+" at -945,350 h100
  text "+" at 40,350 h100
  text "RFID CARD V1.2" at -1760,-435.24 h60
  text "RFID CARD V1.2" at -775,-435 h60
  text "RFID CARD V1.2" at 210,-435 h60
  text "+" at -1930,-1540.24 h100
  text "+" at -945,-1540 h100
  text "+" at 40,-1540 h100
Top Solder:
  rectangle: 10,-1475 110,-1305
  rectangle: 10,-995 110,-815
  rectangle: -975,-995 -875,-815
  rectangle: -975,-1475 -875,-1305
  rectangle: -1960,-995.24 -1860,-815.24
  rectangle: -1960,-1475.24 -1860,-1305.24
  rectangle: -1960,414.76 -1860,584.76
  rectangle: -1960,894.76 -1860,1074.76
  rectangle: -975,415 -875,585
  rectangle: -975,895 -875,1075
  rectangle: 10,895 110,1075
  rectangle: 10,415 110,585